# Altium PCB TSAL_REV2_PCB.PcbDoc
Units mm, origin at the board's own origin, x right, y up, seen from the top; angles counter-clockwise.
Board outline 65 x 34.9 mm, 2 copper layers (Top Layer, Bottom Layer); 22 components, 15 nets, 62 pads, 9 vias.
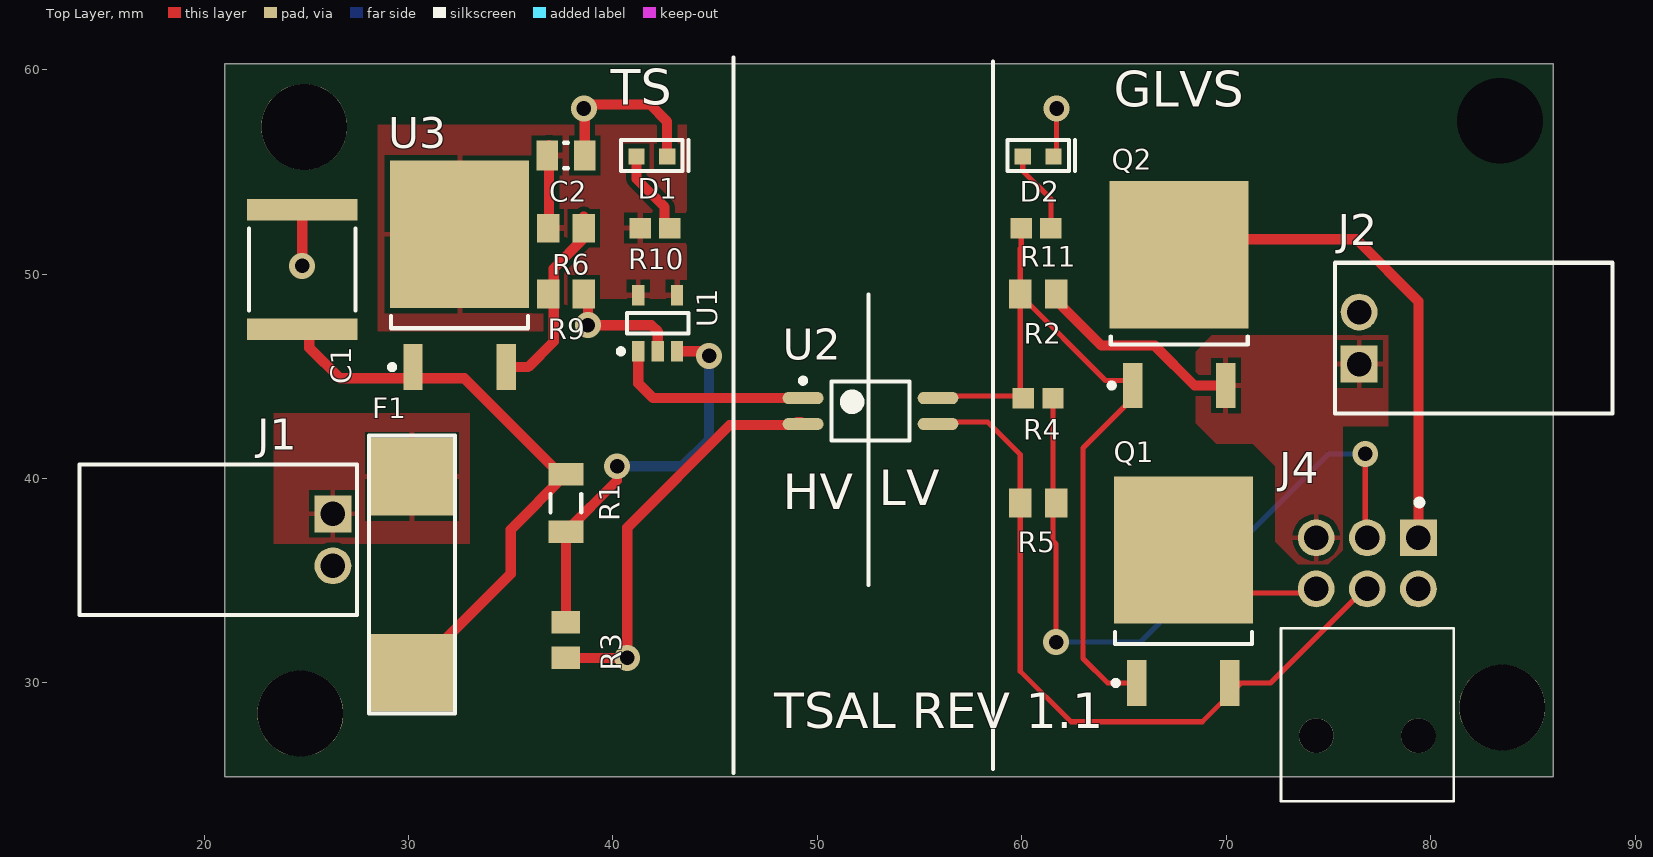
[diagram p0: Top Layer view]
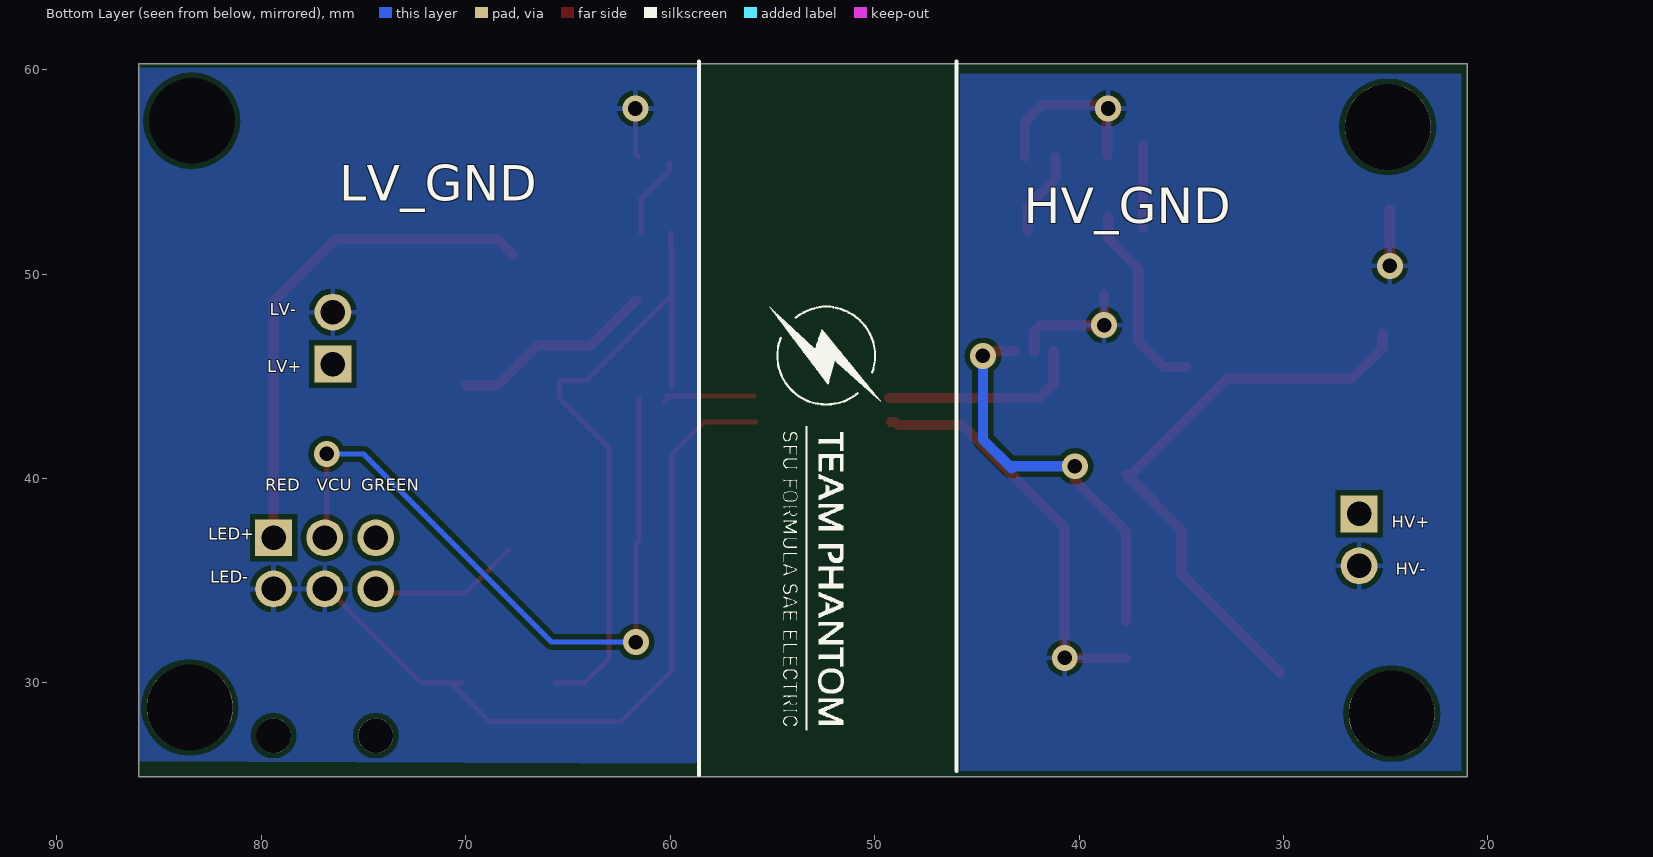
[diagram p1: Bottom Layer view, seen from below]
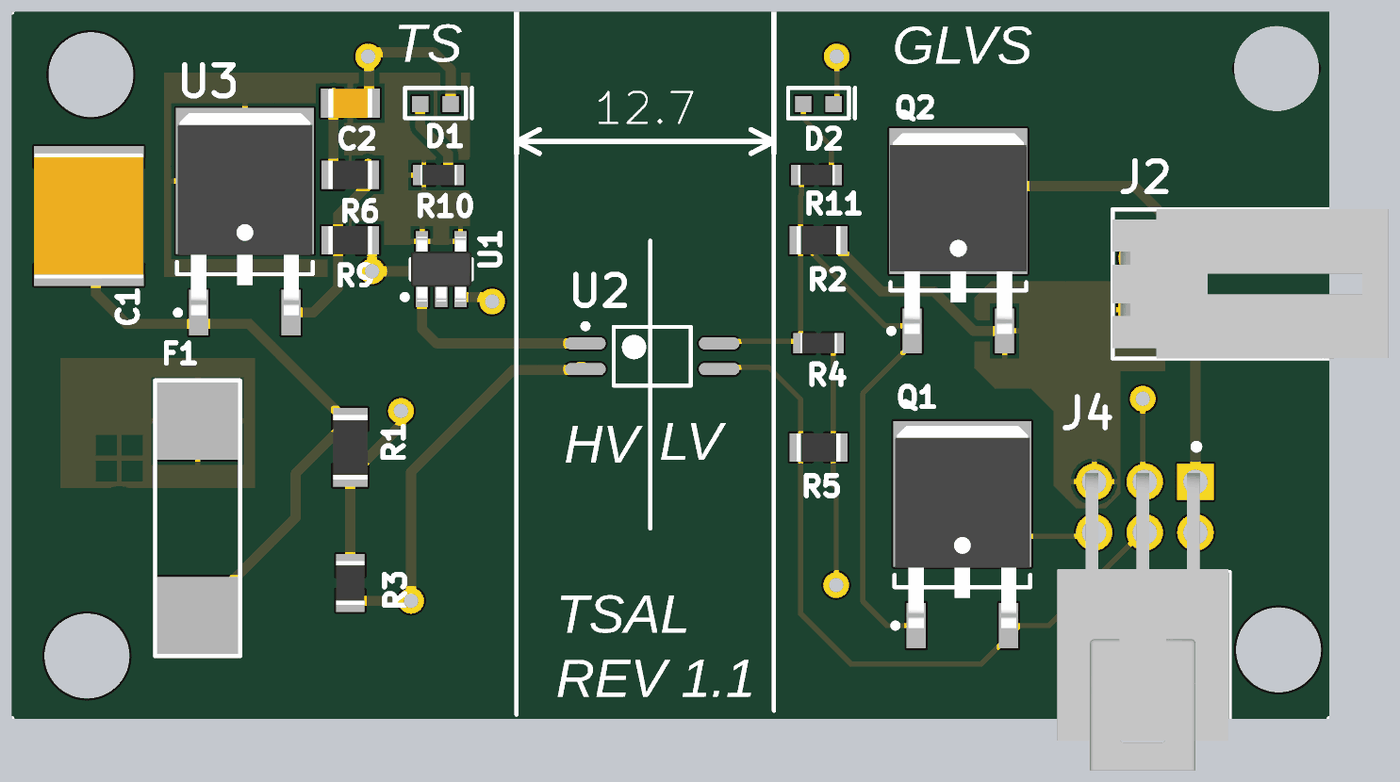
[diagram p2: 3D render of the assembled board from above, using the file's embedded part models]

## Layer stack, top to bottom
Top Solder: solder mask 0.0102, Solder Resist, Dk 3.5
Top Layer: signal copper 0.0356
Dielectric 1: dielectric 0.32, FR-4, Dk 4.8
Bottom Layer: signal copper 0.0356
Bottom Solder: solder mask 0.0102, Solder Resist, Dk 3.5

## Board outline
21,25.4 86,25.4 86,60.3 21,60.3

## Design rules (kind name [scope] priority, off if disabled: settings)
Clearance [All] p1: gap=0.254 ignorepadtopadclearanceinfootprint=FALSE except(0: Arc-Hole Track-Hole SMDPad-Hole THPad-Hole Via-Hole Fill-Hole Poly-Hole Region-Hole Text-Hole)
PolygonConnect [All] p1: connectstyle=Relief reliefconductorwidth=0.254 reliefentries=4 polygonreliefangle="90 Angle" airgapwidth=0.254
RoutingVias [All] p1: holewidth=0.711 width=1.27 viastyle="Through Hole" minholewidth=0.711 minwidth=1.27 maxholewidth=0.711 maxwidth=1.27
SolderMaskExpansion [All] p1: expansion=0.102 istentingtop=FALSE
Width [All] p1: maxlimit=2 minlimit=0.254 preferedwidth=0.254 minimp=50.000000 maximp=50.000000 favimp=50.000000
30 further rules are at their usual default settings.

## Components (designator, comment, footprint, x,y, rotation, side; value= is the part's Value field where it differs from the comment)
C1 "2.2 uF" CAPC5850X25N 24.8,50.225 r270 top
C2 "1 uF" CAPC2012X14N 37.7,55.8 r180 top
D1 "Green" LED_0603 41.9,55.75 r0 top
D2 "Green" LED_0603 60.8,55.75 r0 top
F1 "250V 800mA" FUSE_SMD 30.166,37.5 r270 top
J1 "HV" 2_PIN_CONNECTOR 13.9,37 r270 top
J2 "LV" 2_PIN_CONNECTOR 88.9,46.87 r90 top
J4 "105314-1206" *MOLEX_1053141206 76.9,30.66 r0 top
Q1 "IPD50N06S4L-12" DPAK228P998X235-3N 67.9,34.5 r90 top
Q2 "NTD2955T4G" DPAK228P991X238-3N 67.7,49 r90 top
R1 "110k Ohm" RESC3116X06N 37.7,38.8 r90 top
R2 "10k Ohm" RESC2012X06N 60.8,49.025 r0 top
R3 "10k Ohm" RESC2012X06N 37.7,32.1 r270 top
R4 "80k Ohm" RESC1608X06N 60.8,43.935 r180 top
R5 "30k Ohm" RESC2012X06N 60.8,38.8 r0 top
R6 "6.04k Ohm" RESC2012X06N 37.7,52.25 r180 top
R9 "18.2k Ohm" RESC2012X06N 37.7,49.025 r180 top
R10 "300 Ohm" RESC1608X06N 42.05,52.25 r0 top
R11 "1k Ohm" RESC1608X06N 60.7,52.25 r0 top
U1 "Op Amp" SOT95P280X145-5N 42.188,47.597 r90 top (schematic designator U?)
U2 "EL3H7(B)(TA)-VG" SOIC127P700X200-4N 52.6,43.3 r0 top
U3 "LDO" DPAK228P998X235-3N 32.5,49.95 r90 top

## Footprints (in the part's own frame and the unit in brackets; to place one, negate y for a bottom-side part, rotate by r counter-clockwise, add the part's x,y. Pads: shape width x height; smd on the part's side, far side on the other; paste and mask are expansions set on the pad)
2_PIN_CONNECTOR [mm]
  rect 1.8x1.8 hole 1.2: 1(-1.27,12.4)
  round 1.8 hole 1.2: 2(1.27,12.4)
  silkscreen extent -3.68,0 3.68,13.59, body extent -3.68,0 3.68,13.59, height 8.06
*MOLEX_1053141206 [mm]
  rect 1.8x1.8 hole 1.2: 1(2.5,6.44)
  round 1.8 hole 1.2: 2(0,6.44) 3(-2.5,6.44) 4(2.5,3.94) 5(0,3.94) 6(-2.5,3.94)
  round 1.7 hole 1.7 unplated: None(-2.5,-3.24) None(2.5,-3.24)
  silkscreen extent -4.22,-6.44 4.22,8.31, body extent -4.32,-7.79 4.12,6.87, height 7.85
CAPC2012X14N [mm] "Chip Capacitor, 2-Leads, Body 2.00x1.25mm, IPC Medium Density"
  rect 1.05x1.45 smd: 1(-0.925,0) 2(0.925,0)
  silkscreen extent -0.1,-0.63 0.1,0.63, body extent -1.1,-0.72 1.1,0.72, height 1.4
CAPC5850X25N [mm] "Chip Capacitor, 2-Leads, Body 5.75x5.00mm, IPC Medium Density"
  rect 1.05x5.4 smd: 1(-2.925,0) 2(2.925,0)
  silkscreen extent -2,-2.6 2,2.6, body extent -3.1,-2.7 3.1,2.7, height 2.5
DPAK228P991X238-3N [mm] "D-PAK, 3-Pads, Body 6.21x6.73mm (max), IPC Medium Density"
  rect 2.2x0.95 smd: 1(-4.45,2.28) 4(-4.45,-2.28)
  rect 7.2x6.8 smd: 3(1.95,0)
  silkscreen extent -4.57,-3.35 -2.05,3.43, body extent -4.6,-3.37 5.31,3.37, height 2.38
DPAK228P998X235-3N [mm] "D-PAK, 3-Pads, Body 6.31x6.69mm (max), IPC Medium Density"
  rect 2.25x0.95 smd: 1(-4.5,2.28) 3(-4.5,-2.28)
  rect 7.2x6.8 smd: 4(2,0)
  silkscreen extent -4.62,-3.35 -2,3.43, body extent -4.62,-3.32 5.36,3.32, height 2.45
FUSE_SMD [mm]
  rect 3.81x4.06 smd: 1(-2.6,0) 2(7,0)
  silkscreen extent -4.6,-2.1 9,2.1
LED_0603 [mm]
  rect 0.8x0.8 smd: 1(-0.75,0) 2(0.75,0)
  silkscreen extent -1.5,-0.7 1.8,0.8
RESC1608X06N [mm] "Chip Resistor, 2-Leads, Body 1.60x0.80mm, IPC Medium Density"
  rect 1.05x1 smd: 1(-0.725,0) 2(0.725,0)
  body extent -0.9,-0.5 0.9,0.5, height 0.55
RESC2012X06N [mm] "Chip Resistor, 2-Leads, Body 2.00x1.25mm, IPC Medium Density"
  rect 1.1x1.4 smd: 1(-0.875,0) 2(0.875,0)
  body extent -1.07,-0.7 1.07,0.7, height 0.6
RESC3116X06N [mm] "Chip Resistor, 2-Leads, Body 3.10x1.60mm, IPC Medium Density"
  rect 1.1x1.7 smd: 1(-1.4,0) 2(1.4,0)
  silkscreen extent -0.45,-0.75 0.45,0.75, body extent -1.6,-0.85 1.6,0.85, height 0.65
SOIC127P700X200-4N [mm] "SOIC, 4-Leads, Body 2.70x4.40mm, Pitch 1.27mm, IPC Medium Density"
  oval 2x0.6 smd: 1(-3.3,0.635) 2(-3.3,-0.635) 3(3.3,-0.635) 4(3.3,0.635)
  silkscreen extent -3.42,-1.45 1.9,1.61, body extent -2.3,-1.45 2.3,1.45, height 2
SOT95P280X145-5N [mm] "SOT23, 5-Leads, Body 2.90x2.80mm, Pitch 0.95mm, IPC Medium Density"
  rect 1x0.6 smd: 1(-1.375,0.95) 2(-1.375,0) 3(-1.375,-0.95) 4(1.375,-0.95) 5(1.375,0.95)
  silkscreen extent -1.5,-1.5 0.5,1.92, body extent -1.6,-1.5 1.6,1.5, height 1.45

## Part data
C1: library part CGA9P3X7T2E225K250KE, "CAP CER 2.2UF 250V X7T 2220", Capacitance=2.2uF, Case/Package=2220, Case Code (Metric)=5750, Dielectric=X7T, Manufacturer=TDK, Max Operating Temperature=125°C, Min Operating Temperature=-55°C, Package Quantity=1, Ratings=AEC-Q200, Supplier Part Number 1=445-8766-1-ND, Tolerance=10%, Voltage Rating=250V, Case Code (Imperial)=2220, ComponentLink1Description=http://www.mouser.com/ds/2/400/lcc_commercial_soft_en-775842.pdf?src-supplier=Mouser, ComponentLink1URL=http://www.mouser.com/ds/2/400/lcc_commercial_soft_en-775842.pdf?src-supplier=Mouser, ComponentLink2Description=http://www.farnell.com/datasheets/1839935.pdf?src-supplier=Element14, ComponentLink2URL=http://www.farnell.com/datasheets/1839935.pdf?src-supplier=Element14, Depth=5mm, Features="Soft Termination", Height=2.5mm, Lead Free="Lead Free", Length=5.7mm, Manufacturer Part Number=CGA9P3X7T2E225K250KE, Mount="Surface Mount", Packaging="Tape and Reel", Pricing 1="1=4.7, 10=4.227, 100=3.1935 (USD)", REACH SVHC="No SVHC", Stock 1=26264, Supplier 1=Digi-Key, Termination=SMD/SMT, Thickness=0.11inch, Voltage Rating (DC)=250V, Weight=0.016932oz, Width=5mm
C2: library part CL10A105KP8NNNC, "Cap Ceramic 1uF 10V X5R 10% SMD 0603 85C Paper T/R", Capacitance=1uF, Case/Package=0603, Case Code (Metric)=1608, Dielectric=X5R, Manufacturer=Samsung, Max Operating Temperature=85°C, Min Operating Temperature=-55°C, Package Quantity=1, Supplier Part Number 1=1276-1182-1-ND, Tolerance=10%, Voltage=10V, Case Code (Imperial)=0603, ComponentLink1Description=https://www.verical.com/server-webapp/html/getDatasheet?partID=358616&src-supplier=Verical, ComponentLink1URL=https://www.verical.com/server-webapp/html/getDatasheet?partID=358616&src-supplier=Verical, ComponentLink2Description=http://www1.futureelectronics.com/doc/SAMSUNG%20PASSIVE/CL05B104KQ5NNNC.pdf?src-supplier=Future+Electronics, ComponentLink2URL=http://www1.futureelectronics.com/doc/SAMSUNG%20PASSIVE/CL05B104KQ5NNNC.pdf?src-supplier=Future+Electronics, Contact Plating=Tin, Depth=0.8mm, Height=0.8mm, Length=1.6mm, Manufacturer Part Number=CL10A105KP8NNNC, Mount="Surface Mount", Packaging="Tape and Reel", Pricing 1="1=0.1, 10=0.036, 100=0.0161, 500=0.01152, 1000=0.00905 (USD)", Radiation Hardening=No, Stock 1=3646234, Supplier 1=Digi-Key, Thickness=0.035inch, Voltage Rating=10V, Width=0.031inch
D1 D2: library part LTST-C191KGKT, "LED Uni-Color Green 574nm 2-Pin Chip LED T/R", Case/Package=0603, Case Code (Metric)=1608, Forward Current=30mA, Forward Voltage=2V, Lens Color=Colorless, Manufacturer="Vishay Lite-On", Max Operating Temperature=85°C, Max Power Dissipation=75mW, Min Operating Temperature=-55°C, Package Quantity=1, Reverse Voltage=5V, Supplier Part Number 1=160-1446-1-ND, Test Current=20mA, Case Code (Imperial)=0603, Color=Green, ComponentLink1Description=http://optoelectronics.liteon.com/upload/download/DS22-2000-228/LTST-C191KGKT.PDF?src-supplier=Digi-Key, ComponentLink1URL=http://optoelectronics.liteon.com/upload/download/DS22-2000-228/LTST-C191KGKT.PDF?src-supplier=Digi-Key, Depth=0.8mm, Dominant Wavelength=571nm, Height=0.55mm, Illumination Color=Green, Lead Free="Lead Free", Length=1.6mm, Lens Style=Rectangular,Colorless, Lens Transparency=Clear, Luminous Intensity=35mcd, Manufacturer Part Number=LTST-C191KGKT, Mount="Surface Mount", Number of Elements=1, Number of LEDs=1, Number of Pins=2, Packaging="Tape and Reel", Power Dissipation=75mW, Power Rating=75mW, Pricing 1="1=0.28, 10=0.201, 100=0.0954, 500=0.06364, 1000=0.04984, 2500=0.04878 (USD)", Radiation Hardening=No, Stock 1=840932, Supplier 1=Digi-Key, Viewing Angle=130°, Wavelength=574nm, Width=0.8mm
F1: library part 0678D0800-02, Case/Package=SMD/SMT, Current Rating=800mA, DC Cold Resistance=380mR, Manufacturer=Bel, Max Operating Temperature=125°C, Min Operating Temperature=-55°C, Supplier Part Number 1=507-2258-6-ND, Voltage Rating (AC)=350V, Voltage Rating (DC)=250V, Approvals=cURus, Fuse Type="Board Mount (Cartridge Style Excluded)", Manufacturer Part Number=0678D0800-02, Mount="Surface Mount", Packaging="Tape and Reel", Pricing 1="1=1.2, 5=1.164, 10=1.089, 50=0.901, 100=0.7508, 250=0.732, 500=0.61936, 1000=0.54429 (USD)", Stock 1=2000, Supplier 1=Digi-Key
J1 J2: library part 0705530001, Color=Black, Contact Resistance=30mR, Manufacturer=Molex, Max Operating Temperature=105°C, Min Operating Temperature=-40°C, Supplier Part Number 1=WM4900-ND, ComponentLink1Description=https://www.molex.com/pdm_docs/ps/PS-70400.pdf?src-supplier=Digi-Key, ComponentLink1URL=https://www.molex.com/pdm_docs/ps/PS-70400.pdf?src-supplier=Digi-Key, ComponentLink2Description=http://www.molex.com/webdocs/datasheets/pdf/en-us/0705530001_PCB_HEADERS.pdf?src-supplier=Avnet, ComponentLink2URL=http://www.molex.com/webdocs/datasheets/pdf/en-us/0705530001_PCB_HEADERS.pdf?src-supplier=Avnet, Connector Type="Male Pin", Contact Material=Bronze, Contact Mating Length=0.24inch, Contact Plating=Gold, Depth=13.59mm, Fastening Type=Latch, Housing Color=Black, Housing Material=Polyester, Length=7.37mm, Manufacturer Part Number=0705530001, Mount="Through Hole", Number of Contacts=2, Number of Positions=2, Number of Rows=1, Orientation="Right Angle", Packaging=Rail/Tube, Pitch=2.54mm, Pricing 1="1=0.71, 72=0.53486, 144=0.51264, 504=0.44575, 1008=0.36775, 5040=0.32318, 10008=0.30089 (USD)", Radiation Hardening=No, Stock 1=14591, Supplier 1=Digi-Key, Termination=Solder
J4: "CONN HEADER R/A 6POS 2.5MM", Color=Black, Manufacturer=Molex, Supplier Part Number 1=WM14977-ND, ComponentLink1Description=http://www.farnell.com/datasheets/2221464.pdf?src-supplier=Element14, ComponentLink1URL=http://www.farnell.com/datasheets/2221464.pdf?src-supplier=Element14, ComponentLink2Description=http://www.farnell.com/datasheets/2221464.pdf?src-supplier=Newark, ComponentLink2URL=http://www.farnell.com/datasheets/2221464.pdf?src-supplier=Newark, ComponentLink3Description=http://www.farnell.com/datasheets/2221464.pdf?src-supplier=Farnell, ComponentLink3URL=http://www.farnell.com/datasheets/2221464.pdf?src-supplier=Farnell, ComponentLink4Description=https://www.molex.com/pdm_docs/ps/PS-105300-100-001.pdf?src-supplier=Digi-Key, ComponentLink4URL=https://www.molex.com/pdm_docs/ps/PS-105300-100-001.pdf?src-supplier=Digi-Key, Contact Material=Brass, Contact Plating=Gold, Gender=Male, Manufacturer Part Number=105314-1206, Mount="Through Hole", Number of Rows=2, Pricing 1="1=1.86, 10=1.684, 100=1.4431, 500=1.2026, 1000=1.0308, 5000=0.91398, 10000=0.89336 (USD)", REACH SVHC=Unknown, Stock 1=3932, Supplier 1=Digi-Key, Termination="Through Hole"
Q1: "MOSFET N-CH 60V 50A TO252-3-11", Case/Package=TO-252-3, Continuous Drain Current (ID)=50A, Drain to Source Resistance=21.6mR, Drain to Source Voltage (Vdss)=60V, Gate to Source Voltage (Vgs)=16V, Input Capacitance=2.89nF, Manufacturer=Infineon, Max Operating Temperature=175°C, Max Power Dissipation=50W, Min Operating Temperature=-55°C, Package Quantity=2500, Supplier Part Number 1=IPD50N06S4L12ATMA1CT-ND, ComponentLink1Description=http://www.infineon.com/dgdl/Infineon-IPD50N06S4L_12-DS-v01_00-en.pdf?folderId=db3a30431a5c32f2011a8084a04a6500&fileId=db3a30431ff9881501203885cc580ca0&ack=t&src-supplier=Digi-Key, ComponentLink1URL=http://www.infineon.com/dgdl/Infineon-IPD50N06S4L_12-DS-v01_00-en.pdf?folderId=db3a30431a5c32f2011a8084a04a6500&fileId=db3a30431ff9881501203885cc580ca0&ack=t&src-supplier=Digi-Key, Element Configuration=Single, Fall Time=5ns, Halogen Free="Halogen Free", Height=2.3mm, Lead Free="Lead Free", Length=6.5mm, Manufacturer Part Number=IPD50N06S4L-12, Max Dual Supply Voltage=60V, Number of Pins=3, Packaging="Tape and Reel", Pricing 1="1=0.78, 10=0.689, 100=0.5268, 500=0.41736, 1000=0.33429 (USD)", Rds On Max=12mR, Rise Time=2ns, Stock 1=0, Supplier 1=Digi-Key, Turn-Off Delay Time=25ns, Turn-On Delay Time=6ns, Width=6.22mm
Q2: "Trans MOSFET P-CH 60V 12A 3-Pin(2+Tab) DPAK T/R", Case/Package=DPAK, Continuous Drain Current (ID)=12A, Current Rating=-12A, Drain to Source Breakdown Voltage=-60V, Drain to Source Resistance=155mR, Gate to Source Voltage (Vgs)=20V, Input Capacitance=750pF, Manufacturer="ON Semiconductor", Max Operating Temperature=175°C, Max Power Dissipation=55W, Min Operating Temperature=-55°C, On-State Resistance=180mR, Package Quantity=1, Supplier Part Number 1=NTD2955T4GOSCT-ND, Threshold Voltage=-2.8V, ComponentLink1Description=http://www.onsemi.com/pub/Collateral/NTD2955-D.PDF?src-supplier=Avnet, ComponentLink1URL=http://www.onsemi.com/pub/Collateral/NTD2955-D.PDF?src-supplier=Avnet, ComponentLink2Description=http://www.onsemi.com/pub/Collateral/NTD2955-D.PDF?src-supplier=Avnet+Europe, ComponentLink2URL=http://www.onsemi.com/pub/Collateral/NTD2955-D.PDF?src-supplier=Avnet+Europe, ComponentLink3Description=http://www.onsemi.com/pub_link/Collateral/NTD2955-D.PDF?src-supplier=Element14, ComponentLink3URL=http://www.onsemi.com/pub_link/Collateral/NTD2955-D.PDF?src-supplier=Element14, ComponentLink4Description=http://www.onsemi.com/pub/Collateral/NTD2955-D.PDF?src-supplier=Digi-Key, ComponentLink4URL=http://www.onsemi.com/pub/Collateral/NTD2955-D.PDF?src-supplier=Digi-Key, ComponentLink5Description=http://www.jameco.com/Jameco/Products/ProdDS/1178118.pdf?src-supplier=Jameco, ComponentLink5URL=http://www.jameco.com/Jameco/Products/ProdDS/1178118.pdf?src-supplier=Jameco, Contact Plating=Matte,Tin, Drain to Source Voltage (Vdss)=-60V, Element Configuration=Single, Fall Time=48ns, Height=2.38mm, Lead Free="Lead Free", Length=6.73mm, Manufacturer Part Number=NTD2955T4G, Nominal Vgs=-2.8V, Number of Channels=1, Number of Elements=1, Number of Pins=3, Packaging="Tape and Reel", Power Dissipation=55W, Pricing 1="1=1.04, 10=0.912, 100=0.7036, 500=0.52118, 1000=0.41694 (USD)", Radiation Hardening=No, Rds On Max=180mR, REACH SVHC="No SVHC", Rise Time=45ns, Stock 1=44767, Supplier 1=Digi-Key, Turn-Off Delay Time=26ns, Turn-On Delay Time=10ns, Voltage Rating (DC)=-60V, Width=6.22mm
R1: library part RC1206FR-07110KL, "RES SMD 110K OHM 1% 1/4W 1206", Case/Package=1206, Case Code (Metric)=3216, Manufacturer=Yageo, Max Operating Temperature=155°C, Max Power Dissipation=250mW, Min Operating Temperature=-55°C, Package Quantity=1, Resistance=110kR, Supplier Part Number 1=311-110KFRCT-ND, Temperature Coefficient=100ppm/°C, Tolerance=1%, Voltage Rating=200V, Case Code (Imperial)=1206, ComponentLink1Description=http://www.yageo.com.tw/exep/pages/download/literatures/PYu-R_INT-thick_7.pdf?src-supplier=Digi-Key, ComponentLink1URL=http://www.yageo.com.tw/exep/pages/download/literatures/PYu-R_INT-thick_7.pdf?src-supplier=Digi-Key, ComponentLink2Description=http://www.yageo.com/documents/recent/PYu-RC_Group_51_RoHS_L_9.pdf?src-supplier=Digi-Key, ComponentLink2URL=http://www.yageo.com/documents/recent/PYu-RC_Group_51_RoHS_L_9.pdf?src-supplier=Digi-Key, ComponentLink3Description=http://documents.rs-components.com/techlib://itc_doclist_GB.htm?stockno=6182344&src-supplier=RSComponents, ComponentLink3URL=http://documents.rs-components.com/techlib://itc_doclist_GB.htm?stockno=6182344&src-supplier=RSComponents, ComponentLink4Description=http://www.yageo.com/documents/recent/PYu-RC1206_51_RoHS_L-4.pdf?src-supplier=Future+Electronics, ComponentLink4URL=http://www.yageo.com/documents/recent/PYu-RC1206_51_RoHS_L-4.pdf?src-supplier=Future+Electronics, Composition="Thick Film", Depth=1.6mm, Features="Moisture Resistant", Height=0.55mm, Lead Free="Lead Free", Length=3.1mm, Manufacturer Part Number=RC1206FR-07110KL, Military Standard=Not, Mount="Surface Mount", Number of Terminations=2, Packaging="Tape and Reel", Power Rating=250mW, Pricing 1="1=0.1, 10=0.071, 100=0.0291, 1000=0.01306, 2500=0.01134 (USD)", Stock 1=78364, Supplier 1=Digi-Key, Termination=SMD/SMT, Voltage Rating (DC)=200V, Width=0.063inch
R2 R3: library part RNCP0805FTD10K0, "RES 10K OHM 1% 1/4W 0805", Case/Package=0805, Case Code (Metric)=2012, Manufacturer="Stackpole Electronics", Max Operating Temperature=155°C, Max Power Dissipation=250mW, Min Operating Temperature=-55°C, Resistance=10kR, Supplier Part Number 1=RNCP0805FTD10K0CT-ND, Temperature Coefficient=100ppm/°C, Tolerance=1%, Case Code (Imperial)=0805, ComponentLink1Description=https://www.seielect.com/catalog/SEI-Packaging.pdf?src-supplier=Digi-Key, ComponentLink1URL=https://www.seielect.com/catalog/SEI-Packaging.pdf?src-supplier=Digi-Key, Composition="Thin Film", Features="Moisture Resistant,Anti-Sulfur", Height=0.024inch, Lead Free="Lead Free", Length=0.079inch, Manufacturer Part Number=RNCP0805FTD10K0, Mount="Surface Mount", Number of Terminations=2, Packaging="Tape and Reel", Pricing 1="1=0.1, 10=0.072, 100=0.0277, 1000=0.0122, 2500=0.01053 (USD)", Stock 1=152624, Supplier 1=Digi-Key, Width=0.049inch
R4: library part PTN0603E8002BST1, "RES 80K OHM 0.1% 0.15W 0603", Case/Package=0603, Manufacturer="Vishay Dale", Max Operating Temperature=125°C, Min Operating Temperature=-55°C, Operating Supply Voltage=75V, Power Rating=150mW, Resistance=80kR, Supplier Part Number 1=764-1457-1-ND, Temperature Coefficient=25ppm/°C, Tolerance=0.1%, ComponentLink1Description=http://www.vishay.com/docs/60026/ptn.pdf?src-supplier=Avnet, ComponentLink1URL=http://www.vishay.com/docs/60026/ptn.pdf?src-supplier=Avnet, ComponentLink2Description=http://www.vishay.com/docs/60026/ptn.pdf?src-supplier=Avnet+Asia, ComponentLink2URL=http://www.vishay.com/docs/60026/ptn.pdf?src-supplier=Avnet+Asia, ComponentLink3Description=http://www.vishay.com/docs/60026/ptn.pdf?src-supplier=Digi-Key, ComponentLink3URL=http://www.vishay.com/docs/60026/ptn.pdf?src-supplier=Digi-Key, Composition="Thin Film", Contact Plating=Copper,Tin,Silver, Height=508um, Lead Free="Lead Free", Length=1.63mm, Manufacturer Part Number=PTN0603E8002BST1, Mount="Surface Mount", Packaging="Tape and Reel", Pricing 1="1=0.69, 10=0.578, 100=0.3878 (USD)", Radiation Hardening=No, Stock 1=12027, Supplier 1=Digi-Key, Thickness=508um, Width=813um
R5: library part CRG0805F30K, "Thick Film Resistors CRG0805 1% 30K", Case/Package=0805, Case Code (Metric)=2012, Manufacturer="TE Connectivity", Max Operating Temperature=125°C, Min Operating Temperature=-55°C, Number of Resistors=1, Package Quantity=5000, Power Rating=125mW, Resistance=30kR, Supplier Part Number 1=A126360CT-ND, Temperature Coefficient=100ppm/°C, Tolerance=1%, Voltage Rating=150V, Case Code (Imperial)=0805, Composition="Thick Film", ELV=Compliant, Height=0.55mm, Length=2mm, Manufacturer Part Number=CRG0805F30K, Mount="Surface Mount", Number of Terminations=2, Packaging="Tape and Reel", Pricing 1="1=0.1, 10=0.049, 100=0.02, 1000=0.00898, 2500=0.0078 (USD)", Stock 1=39608, Supplier 1=Digi-Key, Termination=Solder, Weight=0.000194oz, Width=1.25mm
R6: library part RR1220P-6041-D-M, "RES SMD 6.04KOHM 0.5% 1/10W 0805", Case/Package=0805, Case Code (Metric)=2012, Manufacturer=Susumu, Max Operating Temperature=125°C, Min Operating Temperature=-55°C, Power Rating=100mW, Resistance=6.04kR, Supplier Part Number 1=RR12P6.04KDCT-ND, Temperature Coefficient=25ppm/°C, Tolerance=0.5%, Voltage Rating=100V, Case Code (Imperial)=0805, Composition="Thin Film", Height=0.4mm, Lead Free="Lead Free", Length=2mm, Manufacturer Part Number=RR1220P-6041-D-M, Number of Pins=2, Packaging="Tape and Reel", Pricing 1="1=0.11, 10=0.098, 100=0.0376, 1000=0.01654, 2500=0.01428 (USD)", REACH SVHC="No SVHC", Stock 1=40354, Supplier 1=Digi-Key, Termination=SMD/SMT, Voltage Rating (DC)=100V, Width=1.25mm
R9: library part ERA-6AEB1822V, "Panasonic ERA Series Thin Film Surface Mount Resistor 0805 Case 18.2k 0.1% 0.125W 25ppm/C", Case/Package=0805, Case Code (Metric)=2012, Manufacturer=Panasonic, Max Operating Temperature=155°C, Max Power Dissipation=125mW, Min Operating Temperature=-55°C, Package Quantity=5000, Resistance=18.2kR, Supplier Part Number 1=P18.2KDACT-ND, Temperature Coefficient=25ppm/°C, Tolerance=0.1%, Voltage Rating=100V, Case Code (Imperial)=0805, ComponentLink1Description=http://www.farnell.com/datasheets/485442.pdf?src-supplier=Farnell, ComponentLink1URL=http://www.farnell.com/datasheets/485442.pdf?src-supplier=Farnell, ComponentLink2Description=http://www.mouser.com/ds/2/315/AOA0000C237-1100991.pdf?src-supplier=Mouser, ComponentLink2URL=http://www.mouser.com/ds/2/315/AOA0000C237-1100991.pdf?src-supplier=Mouser, ComponentLink3Description=http://www.farnell.com/datasheets/485442.pdf?src-supplier=Element14, ComponentLink3URL=http://www.farnell.com/datasheets/485442.pdf?src-supplier=Element14, ComponentLink4Description=http://uk.rs-online.com/webdocs/0eb1/0900766b80eb1d8c.pdf?src-supplier=RSComponents, ComponentLink4URL=http://uk.rs-online.com/webdocs/0eb1/0900766b80eb1d8c.pdf?src-supplier=RSComponents, ComponentLink5Description=https://produktinfo.conrad.com/datenblaetter/450000-474999/458878-da-01-en-WIDERSTAND_0805_ERA.pdf?src-supplier=Conrad, ComponentLink5URL=https://produktinfo.conrad.com/datenblaetter/450000-474999/458878-da-01-en-WIDERSTAND_0805_ERA.pdf?src-supplier=Conrad, Composition="Metal Film,Thin Film", Contact Plating=Tin, Depth=1.25mm, Features="Automotive AEC-Q200", Height=0.5mm, Lead Free="Lead Free", Length=2mm, Manufacturer Part Number=ERA-6AEB1822V, Military Standard=Not, Mount="Surface Mount", Number of Pins=2, Number of Terminations=2, Packaging="Tape and Reel", Power Rating=125mW, Pricing 1="1=0.36, 10=0.302, 100=0.1182, 1000=0.04948, 2500=0.04536 (USD)", Radiation Hardening=No, REACH SVHC="No SVHC", Stock 1=8429, Supplier 1=Digi-Key, Termination=Solder, Voltage Rating (DC)=100V, Width=1.25mm
R10: library part RR0816P-301-D, "RES SMD 300 OHM 0.5% 1/16W 0603", Case/Package=0603, Case Code (Metric)=1608, Manufacturer=Susumu, Max Operating Temperature=125°C, Max Power Dissipation=63mW, Min Operating Temperature=-55°C, Package Quantity=5000, Resistance=300R, Supplier Part Number 1=RR08P300DCT-ND, Temperature Coefficient=25ppm/°C, Tolerance=0.5%, Voltage Rating=75V, Case Code (Imperial)=0603, ComponentLink1Description=http://www.susumu.co.jp/common/pdf/n_catalog_partition05_en.pdf?src-supplier=Digi-Key, ComponentLink1URL=http://www.susumu.co.jp/common/pdf/n_catalog_partition05_en.pdf?src-supplier=Digi-Key, Composition="Thin Film", Depth=0.8mm, Height=0.4mm, Lead Free="Lead Free", Length=1.6mm, Manufacturer Part Number=RR0816P-301-D, Number of Pins=2, Number of Terminations=2, Packaging="Tape and Reel", Power Rating=63mW, Pricing 1="1=0.11, 10=0.098, 100=0.0376, 1000=0.01654, 2500=0.01428 (USD)", REACH SVHC=Unknown, Stock 1=26864, Supplier 1=Digi-Key, Termination=SMD/SMT, Voltage Rating (DC)=75V, Width=0.8mm
R11: library part RC0603JR-071KL, "RES SMD 1K OHM 5% 1/10W 0603", Case/Package=0603, Case Code (Metric)=1608, Manufacturer=Yageo, Max Operating Temperature=155°C, Min Operating Temperature=-55°C, Package Quantity=5000, Power Rating=100mW, Resistance=1kR, Supplier Part Number 1=311-1.0KGRCT-ND, Temperature Coefficient=100ppm/°C, Tolerance=5%, Voltage Rating=50V, Case Code (Imperial)=0603, ComponentLink1Description=http://www.yageo.com/documents/recent/PYu-RC_Group_51_RoHS_L_2.pdf?src-supplier=Avnet, ComponentLink1URL=http://www.yageo.com/documents/recent/PYu-RC_Group_51_RoHS_L_2.pdf?src-supplier=Avnet, ComponentLink2Description=http://www.farnell.com/datasheets/2167052.pdf?src-supplier=Element14, ComponentLink2URL=http://www.farnell.com/datasheets/2167052.pdf?src-supplier=Element14, ComponentLink3Description=http://www.farnell.com/datasheets/443971.pdf?src-supplier=Element14, ComponentLink3URL=http://www.farnell.com/datasheets/443971.pdf?src-supplier=Element14, ComponentLink4Description=http://www.farnell.com/datasheets/1868787.pdf?src-supplier=Element14, ComponentLink4URL=http://www.farnell.com/datasheets/1868787.pdf?src-supplier=Element14, Composition="Thick Film", Contact Plating=Tin,Matte, Depth=0.8mm, Height=0.45mm, Lead Free="Lead Free", Length=1.6mm, Manufacturer Part Number=RC0603JR-071KL, Military Standard=Not, Number of Pins=2, Packaging="Tape and Reel", Pricing 1="1=0.1, 10=0.019, 100=0.0077, 1000=0.00347, 2500=0.00301 (USD)", Radiation Hardening=No, REACH SVHC=Unknown, Stock 1=11328493, Supplier 1=Digi-Key, Termination=SMD/SMT, Voltage Rating (DC)=50V, Width=0.8mm
U1: library part MCP6001T-I/OT, "MICROCHIP - MCP6001T-I/OT - OP AMP, 1MHZ, 0.6V/uS, SOT-23-5, FULL REEL", Case/Package=SOT-23, Input Bias Current=1pA, Input Offset Voltage (Vos)=4.5mV, Manufacturer=Microchip, Max Operating Temperature=85°C, Max Supply Voltage=6V, Min Operating Temperature=-40°C, Min Supply Voltage=1.8V, Nominal Supply Current=100uA, Operating Supply Voltage=5.5V, Output Current=23mA, Package Quantity=1, Power Supply Rejection Ratio (PSRR)=86dB, Supplier Part Number 1=MCP6001T-I/OTCT-ND, Voltage Gain=112dB, Bandwidth=1MHz, Common Mode Rejection Ratio=60dB, ComponentLink1Description=http://www.microchip.com/mymicrochip/filehandler.aspx?ddocname=en011705&src-supplier=Digi-Key, ComponentLink1URL=http://www.microchip.com/mymicrochip/filehandler.aspx?ddocname=en011705&src-supplier=Digi-Key, ComponentLink2Description=http://www.microchip.com/mymicrochip/filehandler.aspx?ddocname=en011705&src-supplier=Future+Electronics, ComponentLink2URL=http://www.microchip.com/mymicrochip/filehandler.aspx?ddocname=en011705&src-supplier=Future+Electronics, ComponentLink3Description=http://ww1.microchip.com/downloads/jp/DeviceDoc/jp011705.pdf?src-supplier=Avnet+Europe, ComponentLink3URL=http://ww1.microchip.com/downloads/jp/DeviceDoc/jp011705.pdf?src-supplier=Avnet+Europe, ComponentLink4Description=http://www.farnell.com/datasheets/524878.pdf?src-supplier=Element14, ComponentLink4URL=http://www.farnell.com/datasheets/524878.pdf?src-supplier=Element14, ComponentLink5Description=https://www.alliedelec.com/m/d/c27bf9404cef821af6de3a00b37c1e53.pdf?src-supplier=Allied+Electronics, ComponentLink5URL=https://www.alliedelec.com/m/d/c27bf9404cef821af6de3a00b37c1e53.pdf?src-supplier=Allied+Electronics, ComponentLink6Description=https://www.distrelec.biz/Web/Downloads/_t/ds/mcp6001_2_4_eng_tds.pdf?mime=application%2Fpdf&src-supplier=Distrelec, ComponentLink6URL=https://www.distrelec.biz/Web/Downloads/_t/ds/mcp6001_2_4_eng_tds.pdf?mime=application%2Fpdf&src-supplier=Distrelec, ComponentLink7Description=http://www.produktinfo.conrad.com/datenblaetter/650000-674999/651487-da-01-en-IC_OPAMP_MCP6001T_I_OT_SOT_23_5_MCP.pdf?src-supplier=Conrad, ComponentLink7URL=http://www.produktinfo.conrad.com/datenblaetter/650000-674999/651487-da-01-en-IC_OPAMP_MCP6001T_I_OT_SOT_23_5_MCP.pdf?src-supplier=Conrad, Contact Plating=Tin,Matte, Gain Bandwidth Product=1MHz, Height=1.3mm, Lead Free="Lead Free", Length=3.1mm, Manufacturer Part Number=MCP6001T-I/OT, Mount="Surface Mount", Number of Amplifiers=1, Number of Channels=1, Number of Circuits=1, Number of Elements=1, Number of Pins=5, Operating Supply Current=100uA, Output Current per Channel=23mA, Packaging="Tape and Reel", Pricing 1="1=0.24, 25=0.2, 100=0.18 (USD)", Radiation Hardening=No, REACH SVHC="No SVHC", Slew Rate=0.6V/µs, Stock 1=10725, Supplier 1=Digi-Key, Unity Gain Bandwidth Product=1MHz, Voltage=6V, Width=1.8mm
U2: "OPTOISOLATOR 3.75KV TRANS 4-SSOP", Case/Package=SSOP, Collector Emitter Breakdown Voltage=80V, Collector Emitter Saturation Voltage=200mV, Current Transfer Ratio=260%, Forward Current=50mA, Forward Voltage=1.4V, Isolation Voltage=3.75kV, Manufacturer=Everlight, Max Operating Temperature=125°C, Max Power Dissipation=200mW, Min Operating Temperature=-55°C, Package Quantity=1, Reverse Breakdown Voltage=6V, Supplier Part Number 1=1080-1197-6-ND, Approvals=UL, Collector Emitter Voltage (VCEO)=80V, ComponentLink1Description=https://everlightamericas.com/index.php?controller=attachment&id_attachment=2584&src-supplier=Digi-Key, ComponentLink1URL=https://everlightamericas.com/index.php?controller=attachment&id_attachment=2584&src-supplier=Digi-Key, ComponentLink2Description=https://everlightamericas.com/index.php?controller=attachment&amp;id_attachment=2584&src-supplier=Digi-Key, ComponentLink2URL=https://everlightamericas.com/index.php?controller=attachment&amp;id_attachment=2584&src-supplier=Digi-Key, ComponentLink3Description=https://www.verical.com/server-webapp/html/getDatasheet?partID=416716&src-supplier=Verical, ComponentLink3URL=https://www.verical.com/server-webapp/html/getDatasheet?partID=416716&src-supplier=Verical, Fall Time=18000ns, Lead Free="Lead Free", Manufacturer Part Number=EL3H7(B)(TA)-VG, Max Collector Current=50mA, Max Input Current=50mA, Max Output Voltage=80V, Mount="Surface Mount", Number of Channels=1, Number of Elements=1, Number of Pins=4, Output Current per Channel=50mA, Packaging="Tape and Reel", Power Dissipation=200mW, Pricing 1="1=0.42, 10=0.304, 25=0.248, 100=0.1985, 250=0.16752, 500=0.1427, 1000=0.11167, 2500=0.10237 (USD)", Radiation Hardening=No, Rise Time=18000ns, Stock 1=119652, Supplier 1=Digi-Key
U3: library part LR8K4-G, "Standard Regulator Pos 1.2V to 440V 0.01A 3-Pin(2+Tab) TO-252", Case/Package=TO-252-3, Dropout Voltage=450mV, Manufacturer=Microchip, Max Input Voltage=450V, Max Operating Temperature=85°C, Max Output Current=10mA, Max Output Voltage=440V, Max Power Dissipation=2.5W, Min Current Limit=30mA, Min Input Voltage=13.2V, Min Operating Temperature=-40°C, Min Output Voltage=1.2V, Output Current=20mA, Package Quantity=2000, Power Supply Rejection Ratio (PSRR)=60dB, Supplier Part Number 1=LR8K4-GCT-ND, Accuracy=5%, ComponentLink1Description=http://www.farnell.com/datasheets/1849628.pdf?src-supplier=Element14, ComponentLink1URL=http://www.farnell.com/datasheets/1849628.pdf?src-supplier=Element14, Contact Plating=Tin,Matte, Height=2.39mm, Lead Free="Lead Free", Length=6.73mm, Manufacturer Part Number=LR8K4-G, Mount="Surface Mount", Number of Outputs=1, Number of Pins=3, Number of Regulators=1, Output Type=Adjustable, Output Voltage=440V, Packaging="Cut Tape", Polarity=Positive, Pricing 1="1=0.93, 25=0.78, 100=0.71 (USD)", Radiation Hardening=No, REACH SVHC="No SVHC", Stock 1=11899, Supplier 1=Digi-Key, Width=6.1mm

## Free pads (board coordinates)
  round 4.2 hole 4.2 unplated: 1(24.705,28.5) 2(83.5,28.8) 4(24.9,57.2)
  oval 4.2x1.02 hole 4.2 unplated: 3(83.4,57.5)

## Via types
v1: diameter 1.27, hole 0.711, Top Layer to Bottom Layer, 9 vias

## Nets (pads, with @x,y where several pads share a name; then routed paths per layer and width w, separated by ;. In a path a pad name is that pad's centre, name@x,y a point inside that pad or via, vN(x,y) a via of type N, cw(c..) or ccw(c..) an arc to the next point about the centre after c; other vN are vias at no path point)
5V_TS: C2.2 R6.2 R10.1 U1.4 U1.5 U3.4 | length 4.1
  Top Layer w0.5: R6.2@36.875,52.25 C2.2@36.875,56.3
GREEN+: J2.1 J4.3 Q2.4 R2.2 | length 10
  Top Layer w0.5: R2.2@61.675,48.722 63.897,46.5 66.5,46.5 68.45,44.55 Q2.4
GREEN-: J4.6 Q1.4 | length 7.7
  Top Layer w0.254: Q1.4 70,34.4 74.06,34.4 J4.6@74.5,34.84
HV+: F1.1 J1.1
HV_GND: C1.1 C2.1 D1.2 J1.2 R3.2 R9.1 U1.2 U2.2 | length 36.6
  Top Layer w0.5: v1(24.8,50.4) C1.1 ; R3.2 v1(40.7,31.225) 40.7,37.6 45.716,42.616 48.848,42.616 48.996,42.765 U2.2@49.2,42.765 ; v1@38.575,58.3 41.811,58.3 42.65,57.46 D1.2 ; C2.1 v1@38.625,57.625 ; R9.1@38.775,49.025 38.775,47.725 39.005,47.495 41.889,47.495 42.188,47.196 U1.2
  other v1: 38.775,47.5 38.575,58.1
HV_IN: R1.1 R3.1 U1.3 | length 19.5
  Top Layer w0.5: R3.1 R1.1 40.2,39.9 v1(40.2,40.6) ; U1.3 44.478,46.222 v1(44.7,46)
  Bottom Layer w0.5: v1(40.2,40.6) 43.2,40.6 43.3,40.5 44.7,41.9 v1(44.7,46)
LED1: D1.1 R10.2 | length 4.2
  Top Layer w0.5: D1.1 41.15,54.654 42.525,53.279 R10.2@42.525,52.123
LED2: D2.1 R11.2 | length 4
  Top Layer w0.254: D2.1@60.05,55.4 60.05,55.2 60.05,55.05 61.425,53.675 R11.2@61.425,52
LV_GND: D2.2 J2.2 J4.4 J4.5 Q1.3 R5.1 U2.3 | length 39.2
  Top Layer w0.254: U2.3@55.8,42.765 58.335,42.765 59.925,41.175 59.925,36.799 59.925,30.575 62.4,28.1 68.825,28.1 70.725,30 ; D2.2 61.7,55.9 v1(61.7,58.1) ; Q1.3 70.725,30 ; J4.5@77,34.84 72.16,30 70.725,30
R_BIAS: Q1.1 Q2.1 R2.1 R4.2 R11.1 U2.4 | length 37.1
  Top Layer w0.254: U2.4@55.9,44.035 R4.2@60.175,44.035 ; 59.925,44.475 R2.1@59.925,48.975 ; R11.1@59.975,52 59.975,51.3 59.925,51.25 R2.1 R2.1@59.925,48.975 ; R4.2 R4.2@60.3,43.71 ; Q1.1 64.2,30 63,31.2 63,41.5 65.42,43.92 Q2.1 65.42,44.8 64.1,44.8 R2.1@59.925,48.975
RED+: J4.1 Q2.3 | length 24.8
  Top Layer w0.5: Q2.3 68.45,51.7 76.372,51.7 79.4,48.672 J4.1
"REF ADJ": R6.1 R9.2 U3.3 | length 9.5
  Top Layer w0.5: U3.3 35.85,45.45 37.1,46.7 37.1,50.275 38.575,51.75 R6.1 R6.1@38.575,52.8
Signal: U1.1 U2.1 | length 9.9
  Top Layer w0.5: U1.1 41.238,44.662 41.965,43.935 U2.1
TS: C1.2 F1.2 R1.2 U3.1 | length 28.6
  Top Layer w0.5: C1.2@25.146,47.1 25.146,46.4 26.646,44.9 32.721,44.9 37.421,40.2 R1.2 35,37.5 35,35.334 F1.2
VCU: J4.2 R4.1 R5.2 | length 35
  Top Layer w0.254: R4.1 61.525,36.949 61.675,36.799 v1(61.675,32) ; v1(76.8,41.2) 76.8,37.74 77.1,37.44 J4.2@77,37.34
  Bottom Layer w0.254: v1(61.675,32) 65.8,32 75,41.2 v1(76.8,41.2)
pads on no net: J4.None

## Polygon pours and split planes (outlines as drawn)
LV_GND on Bottom Layer "Bottom Layer-LV_GND" (solid, pour order 10): 58.7,60.1 86,60.1 86,26.161 70.065,26.099 58.7,26.055
HV_GND on Bottom Layer "Bottom Layer-HV_GND" (solid, pour order 0): 45.8,59.799 45.8,25.7 21.3,25.7 21.3,59.799
5V_TS on Top Layer "Top Layer-5V_TS" (solid, pour order 22): 28.5,57.3 28.5,47.2 36.6,47.2 38.2,48.8 43.6,48.8 43.6,57.3
HV+ on Top Layer "Top Layer-HV+" (solid, pour order 14): 23.4,43.2 23.4,43.1 23.4,36.8 33,36.8 33,43.2 23.6,43.2
GREEN+ on Top Layer "Top Layer-GREEN+" (solid, pour order 12): 72.4,47 77.917,47 77.917,42.565 75.7,42.565 75.7,36.5 75.6,36.4 75,35.8 73.5,35.8 72.4,36.9 72.4,40.6 71.3,41.7 69.5,41.7 68.5,42.7 68.5,46.2 69.3,47

## Silkscreen, mask and mechanical layers (free items; w line width, h text height)
Top Overlay:
  lines w0.2: 45.9,25.6 45.9,60.6 ; 52.5,34.8 52.5,49 ; 58.6,25.8 58.6,60.4
  text "TS" at 39.9,57.7 h3
  text "GLVS" at 64.5,57.6 h3
  text "LV" at 53,38.1 h3
  text "HV" at 48.3,37.9 h3
  text "TSAL REV 1.1" at 47.9,27.2 h3
Bottom Overlay:
  drawing of 40 lines, arcs and shapes, not listed
  text "LV_GND" at 76.2,53 h3
  text "HV_GND" at 42.7,51.9 h3
  text "LV-" at 79.6,47.8 h1
  text "LV+" at 79.7,45 h1
  text "GREEN" at 75.1,39.2 h1
  text "VCU" at 77.3,39.2 h1
  text "RED" at 79.8,39.2 h1
  text "HV+" at 24.705,37.4 h1
  text "LED+" at 82.6,36.8 h1
  text "HV-" at 24.5,35.1 h1
  text "LED-" at 82.5,34.7 h1
BOARD OUTLINE:
  lines w0.2: 21,60.2 21,25.4 21.1,25.3 ; 21,60.3 86,60.3 ; 21.1,25.4 86,25.4 86,60.25 86.05,60.3
Mechanical 13:
  lines w0.2: 21,25.4 21.1,25.3

## Dimensions
58.6,60.4 to 45.9,54.2 on Top Overlay
21,25.3 to 20.9,60.3 on Top Overlay
21,25.4 to 86,25.4 on Top Overlay